# Altium PCB GeekIMU.PcbDoc
Units mil, origin at the board's own origin, x right, y up, seen from the top; angles counter-clockwise.
Board outline 1150.03 x 1090.03 mil, 2 copper layers (Top Layer, Bottom Layer); 39 components, 54 nets, 179 pads, 84 vias.
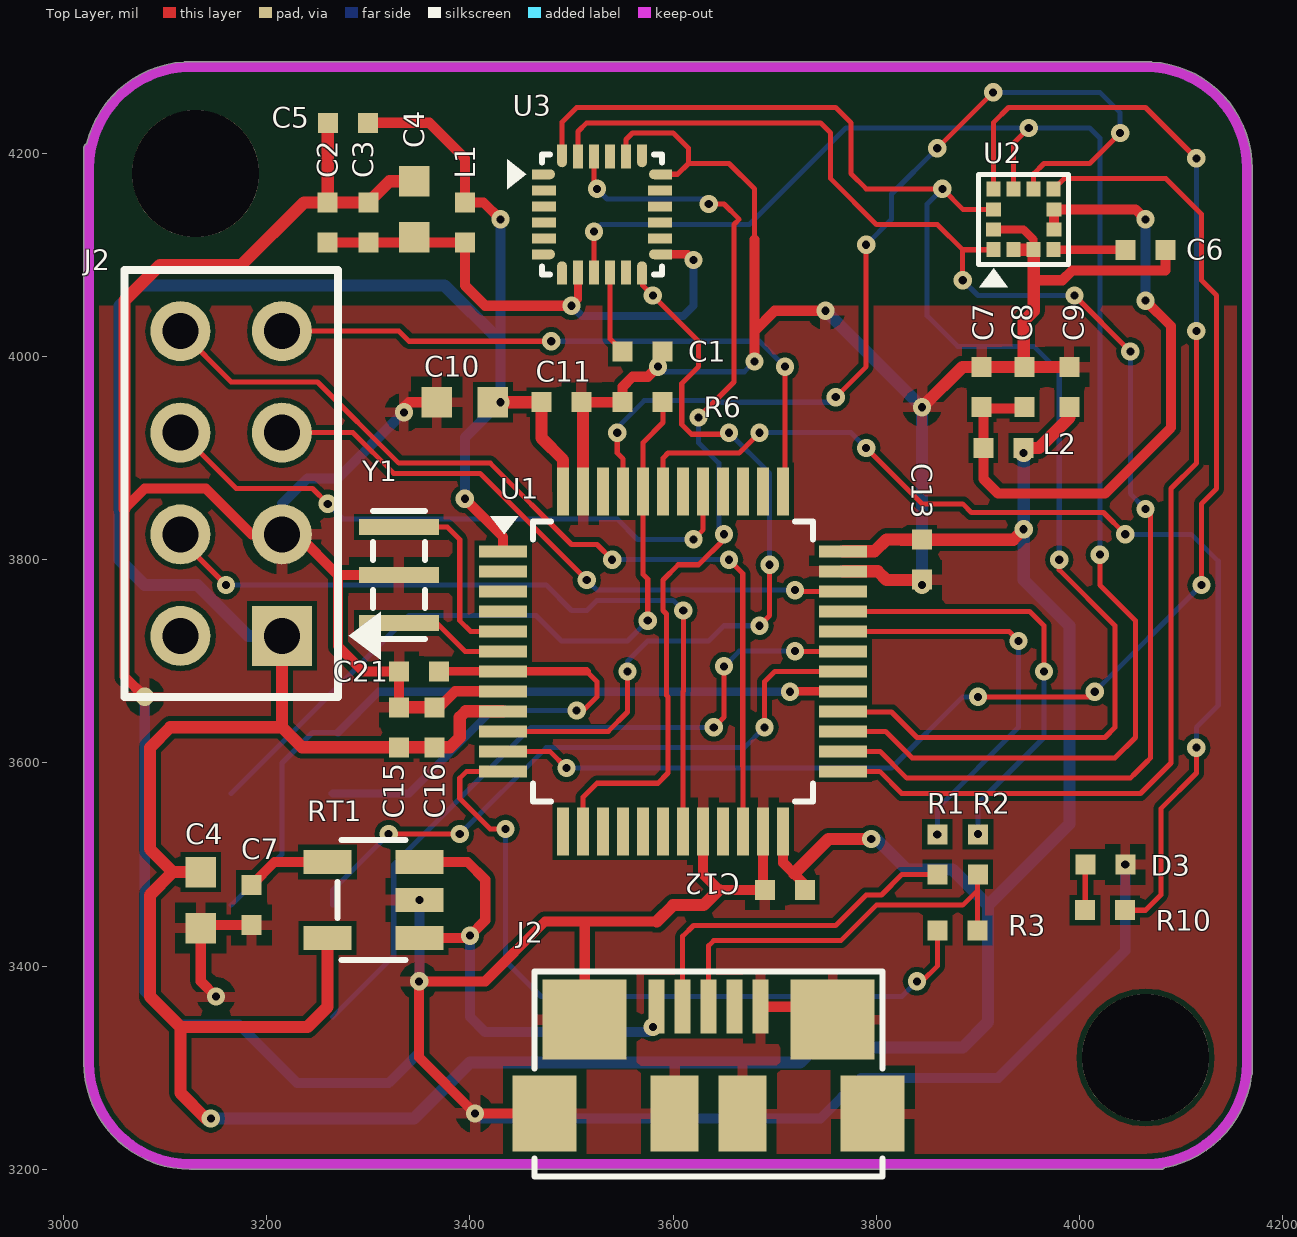
[diagram p0: Top Layer view]
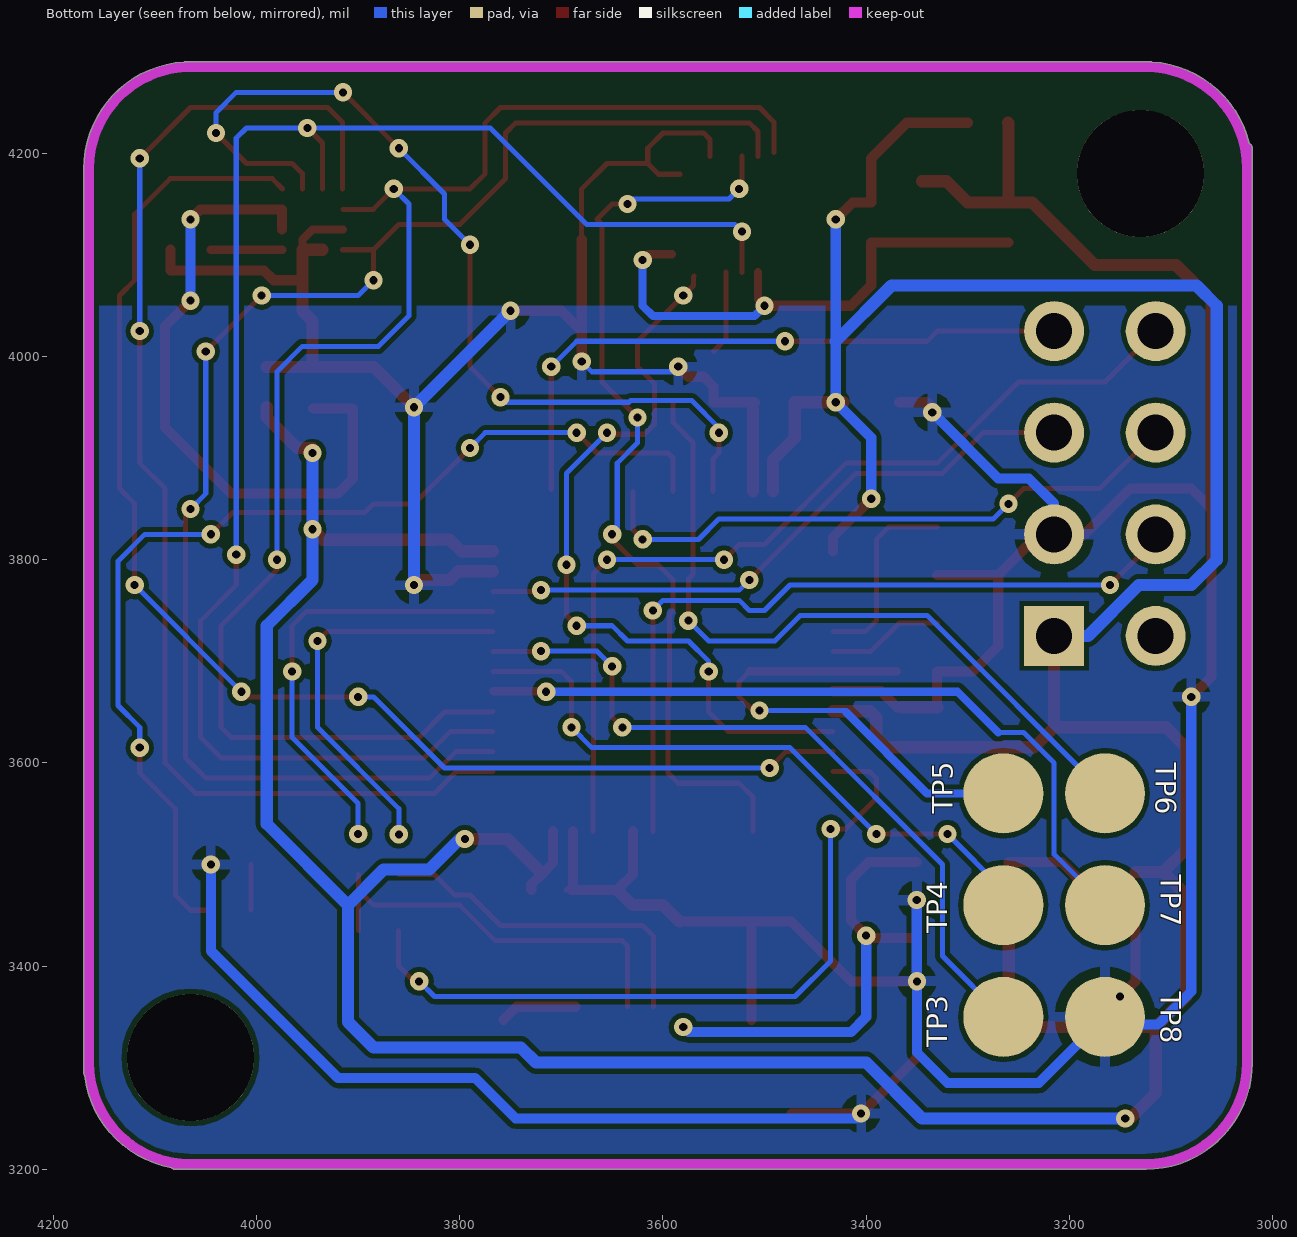
[diagram p1: Bottom Layer view, seen from below]
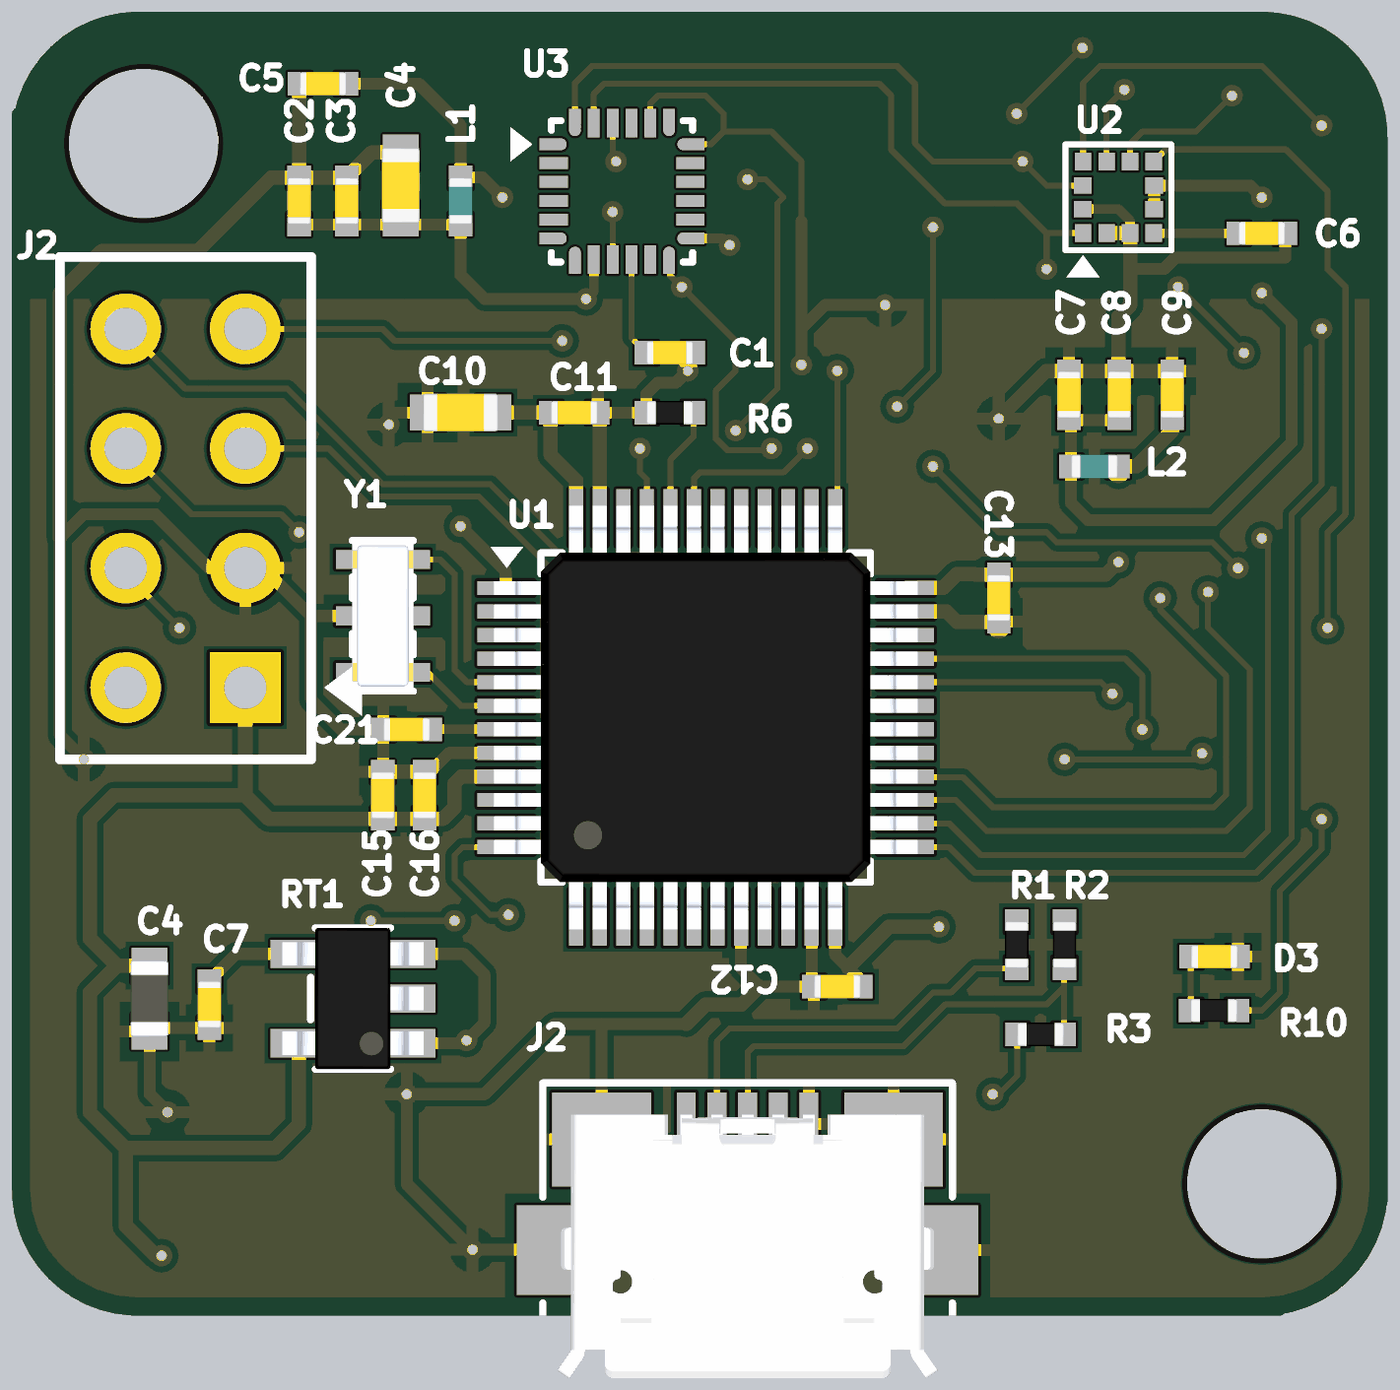
[diagram p2: 3D render of the assembled board from above, using the file's embedded part models]

## Layer stack, top to bottom
Top Solder: solder mask 0.4, Solder Resist, Dk 3.5
Top Layer: signal copper 1.4
Dielectric1: dielectric 12.6, FR-4, Dk 4.8
Bottom Layer: signal copper 1.4
Bottom Solder: solder mask 0.4, Solder Resist, Dk 3.5

## Board outline
3019.99,3305 3019.99,4205 cw(c3025,4205) 3022.9,4209.55 cw(c3125,4185) 3118.62,4289.82 cw(c3120,4285) 3120,4290.02 4070,4290.02 cw(c4070,4285) 4071.38,4289.82 cw(c4065,4185) 4170.02,4185 4170.02,3295 cw(c4165,3295) 4169.25,3292.34 cw(c4065,3305) 4083.75,3201.67 cw(c4080,3205) 4080,3199.99 3125,3199.99 cw(c3125,3305)

## Design rules (kind name [scope] priority, off if disabled: settings)
Clearance [All] p1: gap=5 ignorepadtopadclearanceinfootprint=FALSE except(0: Arc-Hole Track-Hole SMDPad-Hole THPad-Hole Via-Hole Fill-Hole Poly-Hole Region-Hole Text-Hole)
DiffPairsRouting [All] p1: maxlimit=20 minlimit=5 mostfreqgap=5 toplayer_minwidth=15 toplayer_maxwidth=15 toplayer_prefwidth=15 bottomlayer_minwidth=15 bottomlayer_maxwidth=15 bottomlayer_prefwidth=15 maxuncoupledlength=500
FabricationTestpoint [(IsPad And (OnTopLayer Or OnBottomLayer))] p1: side=3 testpointundercomponent=TRUE minsize=40 maxsize=100 preferedsize=60 minholesize=0 maxholesize=40 preferedholesize=32 testpointgrid=1 allowsidetop=TRUE allowsidebottom=TRUE usegrid=TRUE gridtolerance=0.01
HoleSize [All] p1: absolutevalues=TRUE maxlimit=135 minlimit=1 maxpercent=80.000 minpercent=20.000
MinimumSolderMaskSliver [All] p1: minsoldermaskwidth=1
PolygonConnect [All] p1: connectstyle=Relief reliefconductorwidth=10 reliefentries=4 polygonreliefangle="90 Angle" airgapwidth=10
RoutingVias [All] p1: holewidth=8 width=18 viastyle="Through Hole" minholewidth=8 minwidth=8 maxholewidth=50 maxwidth=50
SilkToSilkClearance [All] p1: silktosilkclearance=0
SilkToSolderMaskClearance SilkscreenOverComponentPads [IsPad] p1: minsilkscreentomaskgap=0 clearancetoexposedcopper=TRUE
SolderMaskExpansion [All] p1: expansion=4
Width [All] p1: maxlimit=30 minlimit=5 preferedwidth=10 minimp=50.000000 maximp=50.000000 favimp=50.000000
24 further rules are at their usual default settings.

## Classes and differential pairs
component class MCU: C10 C11 C12 C13 C15 C16 C21 D3 R6 R10 TP3 TP4 TP5 TP6 TP7 U1 Y1
component class Power: C4 C7 RT1
component class Sensor: C1 C2 C3 C4 C5 C6 C7 C8 C9 L1 L2 U2 U3
component class USB: J2 R1 R2 R3 TP8

## Components (designator, comment, footprint, x,y, rotation, side; value= is the part's Value field where it differs from the comment)
C1 "0.1uF" CAP_CERAMIC_0402 3570,4005 r0 top
C2 "0.01uF" CAP_CERAMIC_0402 3260,4131.97 r90 top
C3 "0.1uF" CAP_CERAMIC_0402 3300,4131.97 r90 top
C4 "Cap" RESISTOR_0603 3135,3465 r90 top
C4 "10uF" CAP_CERAMIC_0603 3345,4145 r90 top
C5 "0.1uF" CAP_CERAMIC_0402 3280,4230 r180 top
C6 "0.1uF" CAP_CERAMIC_0402 4065,4105 r0 top
C7 "Cap" CAP_CERAMIC_0402 3185,3460 r90 top
C7 "0.1uF" CAP_CERAMIC_0402 3903.7,3970 r90 top
C8 "1uF" CAP_CERAMIC_0402 3945.8,3970 r90 top
C9 "0.1uF" CAP_CERAMIC_0402 3990,3970 r90 top
C10 "10uF" CAP_CERAMIC_0603 3395,3955 r180 top
C11 "0.1uF" CAP_CERAMIC_0402 3490,3955 r0 top
C12 "0.1uF" CAP_CERAMIC_0402 3710,3475 r180 top
C13 "0.1uF" CAP_CERAMIC_0402 3845,3800 r270 top
C15 "1uF" CAP_CERAMIC_0402 3330,3635 r90 top
C16 "0.1uF" CAP_CERAMIC_0402 3365,3635 r90 top
C21 "0.1uF" CAP_CERAMIC_0402 3350,3690 r180 top
D3 "LED1" CAP_CERAMIC_0402 4025.31,3500 r0 top
J2 "ZX62-B-5PA(11)" ZX62-B-5PA(11) 3635,3360 r180 top
J2 "4-103240-0-04" 4-103240-0-04 3215,3725 r90 top
L1 "MMZ1005S601C" INDUCTOR_0402 3395,4131.97 r90 top
L2 "MMZ1005S601C" INDUCTOR_0402 3925,3910 r0 top
R1 "22 ohm" RESISTOR_0402 3860,3510 r90 top
R2 "22 ohm" RESISTOR_0402 3900,3510 r90 top
R3 "1.5K" RESISTOR_0402 3880,3435 r180 top
R6 "10K" RESISTOR_0402 3570,3955 r0 top
R10 "" RESISTOR_0402 4025,3455 r0 top
RT1 "RT9193" SOT23-5L 3305,3465 r180 top
TP3 "TEST POINT" TEST_POINT_PAD 3265,3350 r0 bottom
TP4 "TEST POINT" TEST_POINT_PAD 3265,3460 r0 bottom
TP5 "TEST POINT" TEST_POINT_PAD 3265,3570 r0 bottom
TP6 "TEST POINT" TEST_POINT_PAD 3165,3570 r90 bottom
TP7 "TEST POINT" TEST_POINT_PAD 3165,3460 r90 bottom
TP8 "TEST POINT" TEST_POINT_PAD 3165,3350 r180 bottom
U1 "STM32F103C8T6" LQFP48 3600,3700 r0 top
U2 "LIS3MDL" LGA-12 3945,4135 r90 top
U3 "MPU-6500" QFN-24 3530,4140 r0 top
Y1 "CSTCE8M00G55-R0" CSTCE 3330,3785 r90 top

## Footprints (in the part's own frame and the unit in brackets; to place one, negate y for a bottom-side part, rotate by r counter-clockwise, add the part's x,y. Pads: shape width x height; smd on the part's side, far side on the other; paste and mask are expansions set on the pad)
4-103240-0-04 [mm]
  rect 1.5x1.5 hole 0.9 mask+0.076: 1(0,0)
  round 1.5 hole 0.9 mask+0.076: 2(0,2.54) 3(2.54,0) 4(2.54,2.54) 5(5.08,0) 6(5.08,2.54) 7(7.62,0) 8(7.62,2.54)
  silkscreen extent -1.52,-2.48 9.15,3.94
CAP_CERAMIC_0402 [mm]
  rect 0.5x0.5 smd mask+0.051: 1(-0.5,0) 2(0.5,0)
  body extent -0.5,-0.25 0.5,0.25, height 0.56
CAP_CERAMIC_0603 [mil]
  rect 30x30 smd mask+2: 1(-27.56,0) 2(27.56,0)
  body extent -31,-16 31,16, height 22
CSTCE [mm]
  rect 0.4x2 smd mask+0.064: 1(-1.2,0) 2(0,0) 3(1.2,0)
  silkscreen extent -1.6,-0.65 1.6,0.65, body extent -1.6,-0.65 1.6,0.65, height 0.7
INDUCTOR_0402 [mm]
  rect 0.5x0.5 smd mask+0.051: 1(-0.5,0) 2(0.5,0)
  body extent -0.5,-0.25 0.5,0.25, height 0.6
LGA-12 [mm]
  rect 0.375x0.35 smd mask+0.051: 1(-0.76,0.75) 2(-0.76,0.25) 3(-0.76,-0.25) 4(-0.76,-0.75) 7(0.76,-0.75) 8(0.76,-0.25) 9(0.76,0.25) 10(0.76,0.75)
  rect 0.35x0.375 smd mask+0.051: 5(-0.25,-0.76) 6(0.25,-0.76) 11(0.25,0.76) 12(-0.25,0.76)
  silkscreen extent -1.7,-1.12 1.13,1.13, body extent -1,-1 1,1, height 1
LQFP48 [mm]
  rect 1.2x0.3 smd mask+0.064: 1(-4.25,2.75) 2(-4.25,2.25) 3(-4.25,1.75) 4(-4.25,1.25) 5(-4.25,0.75) 6(-4.25,0.25) 7(-4.25,-0.25) 8(-4.25,-0.75) 9(-4.25,-1.25) 10(-4.25,-1.75) 11(-4.25,-2.25) 12(-4.25,-2.75) 25(4.25,-2.75) 26(4.25,-2.25) 27(4.25,-1.75) 28(4.25,-1.25) 29(4.25,-0.75) 30(4.25,-0.25) 31(4.25,0.25) 32(4.25,0.75) 33(4.25,1.25) 34(4.25,1.75) 35(4.25,2.25) 36(4.25,2.75)
  rect 0.3x1.2 smd mask+0.064: 13(-2.75,-4.25) 14(-2.25,-4.25) 15(-1.75,-4.25) 16(-1.25,-4.25) 17(-0.75,-4.25) 18(-0.25,-4.25) 19(0.25,-4.25) 20(0.75,-4.25) 21(1.25,-4.25) 22(1.75,-4.25) 23(2.25,-4.25) 24(2.75,-4.25) 37(2.75,4.25) 38(2.25,4.25) 39(1.75,4.25) 40(1.25,4.25) 41(0.75,4.25) 42(0.25,4.25) 43(-0.25,4.25) 44(-0.75,4.25) 45(-1.25,4.25) 46(-1.75,4.25) 47(-2.25,4.25) 48(-2.75,4.25)
  silkscreen extent -4.58,-3.5 3.5,3.62, body extent -4.5,-4.5 4.5,4.5, height 1.5
QFN-24 [mm]
  rect 0.4x0.25 smd mask+0.05: 1(-1.55,1) 6(-1.55,-1) 13(1.55,-1) 18(1.55,1)
  rrect100% 0.35x0.25 smd mask+0.05: 1(-1.35,1) 6(-1.35,-1) 13(1.35,-1) 18(1.35,1)
  rect 0.6x0.25 smd mask+0.05: 2(-1.45,0.6) 3(-1.45,0.2) 4(-1.45,-0.2) 5(-1.45,-0.6) 14(1.45,-0.6) 15(1.45,-0.2) 16(1.45,0.2) 17(1.45,0.6)
  rect 0.25x0.4 smd mask+0.05: 7(-1,-1.55) 12(1,-1.55) 19(1,1.55) 24(-1,1.55)
  rrect100% 0.25x0.35 smd mask+0.05: 7(-1,-1.35) 12(1,-1.35) 19(1,1.35) 24(-1,1.35)
  rect 0.25x0.6 smd mask+0.05: 8(-0.6,-1.45) 9(-0.2,-1.45) 10(0.2,-1.45) 11(0.6,-1.45) 20(0.6,1.45) 21(0.2,1.45) 22(-0.2,1.45) 23(-0.6,1.45)
  silkscreen extent -2.37,-1.5 1.5,1.5, body extent -1.5,-1.5 1.5,1.5, height 0.9
RESISTOR_0402 [mm]
  rect 0.5x0.5 smd mask+0.051: 1(-0.5,0) 2(0.5,0)
  body extent -0.5,-0.25 0.5,0.25, height 0.38
RESISTOR_0603 [mil]
  rect 30x30 smd mask+2: 1(-27.56,0) 2(27.56,0)
  body extent -32,-16 31,16, height 20
SOT23-5L [mm]
  rect 1.2x0.6 smd mask+0.051: 1(-1.15,0.95) 2(-1.15,0) 3(-1.15,-0.95) 4(1.15,-0.95) 5(1.15,0.95)
  silkscreen extent -0.8,-1.5 0.9,1.5, body extent -1.5,-1.5 1.5,1.5, height 1.3
TEST_POINT_PAD [mm]
  round 2 smd mask+0.064: 1(0,0)
ZX62-B-5PA(11) [mm]
  rect 0.4x1.35 smd mask+0.064: 1(-1.3,0) 2(-0.65,0) 3(0,0) 4(0.65,0) 5(1.3,0)
  rect 2.1x2 smd mask+0.064: 6(-3.1,0.325) 7(3.1,0.325)
  rect 1.6x1.9 smd mask+0.064: 8(-4.1,2.675) 9(4.1,2.675)
  rect 1.2x1.9 smd mask+0.064: 8(-0.85,2.675) 9(0.85,2.675)
  silkscreen extent -4.35,-0.87 4.35,4.25, body extent -4.04,-0.2 4.04,5.4, height 2.79

## Part data
C1 C3 C5 C6 C7 C9 C11 C12 C13 C16 C21: library part "CAP, CERAMIC", "CAP, CERAMIC, 0.1uF, ?0%, 16V, X7R, 0402"
C2: library part "CAP, CERAMIC", "CAP, CERAMIC, 0.01uF, ?0%, 25V, X7R, 0402"
C4 C7: "Capacitor"
C4 C10: library part "CAP, CERAMIC", "CAP, CERAMIC, 10uF, ?0%, 6.3V, X5R, 0603"
C8 C15: library part "CAP, CERAMIC", "CAP, CERAMIC, 1uF, ?0%, 10V, X5R, 0402"
D3: "Typical RED GaAs LED"
J2: "CONNECTOR, USB MICRO B, R/A, SMD"
J2: "CONNECTOR, HEADER, 2X4, 0.1\" PITCH"
L1 L2: library part INDUCTOR, "FERRITE CHIP BEAD, 600 OHM @ 100MHz, 300mA, 0402"
R1 R2: library part RESISTOR, "RES, 22 OHM, 1/10W, ?%, 0402"
R3: library part RESISTOR, "RES, 1.5K OHM, 1/10W, ?%, 0402"
R6: library part RESISTOR, "RES, 10K OHM, 1/10W, ?%, 0402"
R10: library part Res2, "Resistor"
RT1: "Power"
TP3 TP4 TP5 TP6 TP7 TP8: library part TEST_POINT
U1: "IC, STM32 MICROCONTROLLER, ARM CORTEX M3"
U2: "IC, MEMS 3 AXIS MAGNETOMETER"
U3: "IC, MEMS 3 AXIS GYROSCOPE AND 3 AXIS ACCELEROMETER"
Y1: "CERAMIC RESONATOR, 8MHz, +/-0.2%, 33pF, SMD"

## Free pads (board coordinates)
  round 125 hole 125 unplated: 0(3130,4180) 0(4065,3310)

## Via types
v1: diameter 18, hole 8, Top Layer to Bottom Layer, tented both sides, 84 vias

## Nets (pads, with @x,y where several pads share a name; then routed paths per layer and width w, separated by ;. In a path a pad name is that pad's centre, name@x,y a point inside that pad or via, vN(x,y) a via of type N, cw(c..) or ccw(c..) an arc to the next point about the centre after c; other vN are vias at no path point)
3.3V: C4.2@3135,3492.56 C5.1 C9.1 C10.1 C11.1 C12.1 C13.1 C15.1 C16.1 J2.1@3215,3725 L1.2 L2.2 RT1.5 U1.1 U1.9 U1.24 U1.36 U1.48 | length 4652.9
  Top Layer w10: C5.1 3360,4230 3395,4195 L1.2 3413.35,4151.65 v1(3430,4135) ; v1(3395,3860) 3432.68,3822.32 U1.1 ; U1.24 3708.27,3501.73 3718.98,3491.02 3729.68,3480.32 C12.1
  Top Layer w12: C4.2@3135,3492.56 3107.56,3492.56 ; v1(3145,3250) 3140,3250 3115,3275 3115,3340 ; J2.1@3215,3725 3215,3635 ; RT1.5 3259.72,3359.72 3240,3340 3115,3340 ; C10.1 v1(3430,3955) C11.1 3470.32,3919.68 3491.73,3898.27 U1.48 ; U1.9 3395.79,3650.79 3390,3645 3390,3625 3380.32,3615.32 C16.1 C15.1 3234.68,3615.32 3215,3635 ; 3718.98,3491.02 3752.95,3525 v1(3795,3525) ; U1.36 3798.27,3808.27 3810,3820 3824.68,3820 3825,3819.68 C13.1 3934.68,3819.68 v1(3945,3830) ; L2.2@3945,3910 3960,3910 3990,3940 C9.1 ; 3107.56,3492.56 3085,3470 3085,3370 3115,3340 ; 3107.56,3492.56 3085,3515.12 3085,3615 3105,3635 3215,3635
  Bottom Layer w10: v1(3395,3860) 3395,3920 v1(3430,3955) 3430,4015 v1(3430,4135)
  Bottom Layer w12: v1(3145,3250) 3345,3250 3400,3305 3725,3305 3740,3320 3885,3320 3910,3345 3910,3460 ; J2.1@3215,3725 3181.72,3725 3131.72,3775 3080,3775 3055,3800 3055,4050 3075,4070 3375,4070 3430,4015 ; v1(3795,3525) 3800,3525 3830,3495 3875,3495 3910,3460 ; v1(3945,3905) v1(3945,3830) 3945,3780 3990,3735 3990,3540 3910,3460
AUX_CL: U3.7
AUX_DA: U3.21
BOOT0: R6.2 TP6.1 U1.44 | length 726.2
  Top Layer w5: v1(3575,3740) 3575,3780.94 3570.47,3785.47 U1.44 3570.47,3915.47 3590,3935 3590,3954.69 R6.2
  Bottom Layer w5: TP6.1 3340,3745 3465,3745 3490,3720 3555,3720 v1(3575,3740)
D+: J2.4@3609.41,3360 R1.1 | length 345.2
  Top Layer w5: J2.4@3609.41,3360 3609.41,3429.41 3620,3440 3760,3440 3790,3470 3805,3470 3825.32,3490.32 R1.1
D-: J2.3@3635,3360 R2.1 R3.1 | length 402.8
  Top Layer w5: J2.3@3635,3360 3635,3420 3640,3425 3765,3425 3800,3460 3885,3460 3899.68,3474.68 ; R3.1 3899.68,3474.68 ; R2.1 3899.68,3490 3899.68,3474.68
FSYNC: U3.11
GND: C1.2 C2.2 C3.2 C4.1@3135,3437.44 C4.2@3345,4172.56 C5.2 C6.2 C7.1@3185,3440.32 C7.2@3903.7,3989.68 C8.2 C9.2 C10.2 C11.2 C12.2 C13.2 C15.2 C16.2 C21.2 D3.2 J2.1@3686.18,3360 J2.3@3215,3825 J2.6@3757.05,3347.2 J2.7@3512.95,3347.2 J2.8@3668.46,3254.69 J2.8@3796.42,3254.69 J2.9 R6.1 RT1.2 TP8.1 U1.8 U1.20 U1.23 U1.35 U1.47 U2.2 U2.3 U2.12 U3.18 U3.20 Y1.2 | length 5839.9
  Top Layer w5: U3.20 3553.62,4213.62 3560,4220 3600,4220 3615,4205 3615,4190 ; U3.18@3583.15,4179.37 3591.02,4179.37 3604.37,4179.37 3615,4190 ; 3680,4115 3680,4165 3655,4190 3615,4190 ; C12.2@3688.58,3481.73 C12.2@3695.31,3475
  Top Layer w8: U2.12 3944.84,4125.16 3954.84,4115.16 U2.3
  Top Layer w10: v1(3080,3665) 3060,3685 3060,3850 3080,3870 3140,3870 3185,3825 J2.3@3215,3825 ; v1(3150,3370) 3135,3385 3135,3437.44 3137.88,3440.32 C7.1@3185,3440.32 ; J2.3@3230,3825 3270,3785 ; C15.2 3330.32,3655 C21.2 3295,3690 3270,3715 3270,3785 ; Y1.2 3270,3785 ; v1(3335,3945) 3335,3950 3340,3955 C10.2 ; C16.2 3369.69,3654.69 3385.47,3670.47 U1.8 ; J2.9@3473.27,3255 v1(3405,3255) 3350,3310 v1(3350,3385) 3415,3385 3473.82,3443.82 3515,3443.82 ; C11.2 R6.1 3550.32,3970.32 3560,3980 3575,3980 v1(3585,3990) ; J2.7@3512.95,3347.2 3512.95,3441.77 3515,3443.82 ; 3583.82,3443.82 3515,3443.82 ; U1.20 3629.53,3490.47 3645,3475 C12.2 ; v1(3680,3995) 3680,4025 ; 3680,4115 3680,4025 ; J2.1@3686.18,3360 3744.25,3360 J2.6@3757.05,3347.2 ; C12.2@3688.58,3481.73 U1.23 ; v1(3750,4045) 3700,4045 3680,4025 ; 3954.84,4075 3983.13,4075 3992.81,4084.68 4084.68,4084.68 C6.2
  Top Layer w12: 3060,3850 3060,4055 3095,4090 3175,4090 3236.65,4151.65 C2.2 ; C5.2 3260,4229.69 C2.2 ; C15.2 C16.2 ; C4.2@3345,4172.56 3320.91,4172.56 C3.2 C2.2 ; U1.47 C11.2@3511.42,3948.27 ; 3583.82,3443.82 3600,3460 3630,3460 3645,3475 ; U1.35 3801.42,3788.58 3810,3780 C13.2@3844.69,3780 ; v1(3845,3950) 3884.68,3989.68 3903.7,3989.68 C8.2 ; U2.2 U2.3 3954.84,4075 3954.84,4044.84 3945,4035 3945,3990.48 C8.2 ; C9.2 C8.2
  Bottom Layer w5: v1(3585,3990) 3590,3985 3670,3985 v1(3680,3995)
  Bottom Layer w10: v1(3080,3665) 3080,3375 3112.5,3342.5 3172.5,3342.5 3230,3285 3320,3285 3350,3315 v1(3350,3385) 3350.28,3385.28 v1(3350.28,3465) ; J2.3@3215,3825 3215,3855 3240,3880 3270,3880 v1(3335,3945) ; v1(3405,3255) 3410,3250 3745,3250 3785,3290 3920,3290 4045,3415 v1(4045,3500)
  Bottom Layer w12: v1(3750,4045) v1(3845,3950) v1(3845,3775)
GYRO_CS: U1.14 U3.22 | length 923.4
  Top Layer w5: U1.14 3511.42,3566.42 3525,3580 3585,3580 3595,3590 3595,3665 3593.5,3666.5 3593.5,3746.5 3590,3750 3590,3780 3605,3795 3625,3795 3650,3820 v1(3650,3825) ; U3.22 3522.13,4167.87 v1(3525,4165) ; v1(3625,3940) 3660,3975 3660,4130 3665,4135 3650,4150 v1(3635,4150)
  Bottom Layer w5: v1(3525,4165) 3535,4155 3630,4155 v1(3635,4150) ; v1(3625,3940) 3625,3915 3645,3895 3645,3830 v1(3650,3825)
GYRO_IRQ: U1.10 U3.12 | length 762.2
  Top Layer w5: U1.10 3536.1,3631.1 3555,3650 v1(3555,3690) ; U3.12@3569.37,4078.98 3570,4078.35 3570,4070 v1(3580,4060) 3625,4015 3625,3990 3608.5,3973.5 3608.5,3933.17 3618.17,3923.5 3653.5,3923.5 v1(3655,3925) ; v1(3685,3735) 3695,3745 v1(3695,3795)
  Bottom Layer w5: v1(3555,3690) 3555,3700 3575,3720 3635,3720 3650,3735 v1(3685,3735) ; v1(3655,3925) 3695,3885 v1(3695,3795)
ICLK: U1.21
IDATA: J2.8@3115,4025 U1.22 | length 906.3
  Top Layer w5: J2.8@3115,4025 3165,3975 3250,3975 3330,3895 3420,3895 3500,3815 3525,3815 v1(3540,3800) ; v1(3655,3800) 3668.5,3786.5 3668.5,3596.5 3668.9,3596.1 U1.22
  Bottom Layer w5: v1(3540,3800) v1(3655,3800)
IO0: U1.18
IO1: J2.4@3115,3825 U1.19 | length 754.7
  Top Layer w5: J2.4@3115,3825 3115,3820 v1(3160,3775) ; U1.19 3609.84,3670.16 3610,3670.32 v1(3610,3750)
  Bottom Layer w5: v1(3160,3775) 3475,3775 3500,3750 3515,3750 3525,3760 3600,3760 v1(3610,3750)
IO3: U1.40
IO4: J2.6@3115,3925 U1.41 | length 599.8
  Top Layer w5: J2.6@3115,3925 3170,3870 3245,3870 v1(3260,3855) ; v1(3620,3820) 3629.53,3829.53 U1.41
  Bottom Layer w5: v1(3260,3855) 3275,3840 3545,3840 3565,3820 v1(3620,3820)
LIS3MDL_VDDIO: C7.1@3903.7,3950.31 C8.1 L2.1 U2.5 U2.6 | length 654.8
  Top Layer w10: C8.1@3944.18,3948.7 3905.32,3948.7 L2.1 3905.32,3879.68 3920,3865 4025,3865 4090,3930 4090,4030 v1(4065,4055) ; U2.5 U2.6 4055.16,4144.84 v1(4065,4135)
  Bottom Layer w10: v1(4065,4055) v1(4065,4135)
MAG_CS: U1.25 U2.10 | length 1241.3
  Top Layer w5: U1.25 3803.27,3591.73 3825,3570 4060,3570 4090,3600 4090,3870 4115,3895 v1(4115,4025) ; U2.10 3915.47,4230.47 3930,4245 4065,4245 v1(4115,4195)
  Bottom Layer w5: v1(4115,4025) v1(4115,4195)
MAG_DRDY: U1.45 U2.8 | length 927.9
  Top Layer w5: v1(3545,3925) 3545,3905 3550.79,3899.21 U1.45 ; v1(3760,3960) 3790,3990 v1(3790,4110) ; v1(3860,4205) v1(3915,4260) ; U2.8 3954.84,4179.84 3965,4190 4010,4190 v1(4040,4220)
  Bottom Layer w5: v1(3545,3925) 3545,3930 3571.5,3956.5 3631.83,3956.5 3633.33,3955 3755,3955 v1(3760,3960) ; v1(3790,4110) 3815,4135 3815,4160 v1(3860,4205) ; v1(3915,4260) 4020,4260 4040,4240 v1(4040,4220)
MAG_IRQ: U1.11 U2.7 | length 1310.3
  Top Layer w5: U1.11 3478.58,3611.42 v1(3495,3595) ; v1(3900,3665) 4010,3665 v1(4015,3670) ; U2.7 3984.61,4175 4085,4175 4120,4140 4120,4075 4135,4060 4135,3870 4120,3855 v1(4120,3775)
  Bottom Layer w5: v1(3495,3595) 3815,3595 3885,3665 v1(3900,3665) ; v1(4015,3670) v1(4120,3775)
MAG_SOC: U1.46
MEMS_MISO: U1.27 U2.9 U3.9 | length 1561.8
  Top Layer w5: U3.9 v1(3522.13,4122.87) ; U1.27 3808.9,3631.1 3835,3605 4035,3605 4055,3625 4055,3740 4020,3775 v1(4020,3805) ; U2.9 3935.16,4210.16 v1(3950,4225)
  Bottom Layer w5: v1(3522.13,4122.87) 3529.25,4130 3675,4130 3770,4225 v1(3950,4225) 4010,4225 4020,4215 v1(4020,3805)
MEMS_MOSI: U1.28 U2.11 U3.24 | length 1470.1
  Top Layer w5: U3.24@3490.63,4201.02 3490.63,4230.63 3505,4245 3760,4245 3775,4230 3775,4180 3790,4165 v1(3865,4165) 3885.16,4144.84 U2.11 ; U1.28 3768.11,3650 3815,3650 3840,3625 4025,3625 4035,3635 4035,3735 3980,3790 v1(3980,3800)
  Bottom Layer w5: v1(3865,4165) 3850,4150 3850,4040 3880,4010 3955,4010 3980,3985 v1(3980,3800)
MEMS_SCK: U1.26 U2.1 U3.23 | length 1469.4
  Top Layer w5: U3.23 3506.38,4221.38 3515,4230 3745,4230 3755,4220 3755,4175 3800,4130 3860,4130 3884.92,4105.08 ; U1.26 3803.58,3611.42 3830,3585 4050,3585 4055,3590 4065,3600 4070,3605 4070,3845 v1(4065,3850) ; v1(3885,4075) 3885,4105 3884.92,4105.08 ; U2.1 3884.92,4105.08 ; v1(3995,4060) v1(4050,4005)
  Bottom Layer w5: v1(3885,4075) 3900,4060 v1(3995,4060) ; v1(4050,4005) 4050,3865 v1(4065,3850)
MPU6500_VDDIO: C2.1 C3.1 C4.1@3345,4117.44 L1.1 U3.8 U3.13 | length 530.7
  Top Layer w8: v1(3500,4050) 3506.38,4056.38 U3.8 ; U3.13@3591.02,4100.63 3614.37,4100.63 v1(3620,4095)
  Top Layer w10: C2.1 C3.1 L1.1 3395,4070 3415,4050 v1(3500,4050)
  Bottom Layer w8: v1(3500,4050) 3510,4040 3610,4040 3620,4050 v1(3620,4095)
NC1: U3.1
NC2: U3.2
NC3: U3.3
NC4: U3.4
NC5: U3.5
NC6: U3.6
NC7: U3.14
NC8: U3.15
NC9: U3.16
NC10: U3.17
NetC1_1: C1.1 U3.10 | length 83.1
  Top Layer w5: U3.10 3537.87,4017.44 C1.1
NetC6_1: C6.1 U2.4 | length 70.8
  Top Layer w8: U2.4 4045.24,4105.08 C6.1
NetC7_2: C7.2@3185,3479.69 RT1.4 | length 84.1
  Top Layer w10: C7.2@3185,3479.69 3207.72,3502.4 RT1.4
NetD3_1: D3.1 R10.1 | length 44.7
  Top Layer w5: R10.1@4005.63,3455.32 D3.1
NRST: C21.1 TP5.1 U1.7 | length 473.9
  Top Layer w5: v1(3505,3651.5) 3511.5,3651.5 3525,3665 3525,3680 3515,3690
  Top Layer w8: C21.1 3369.84,3690.16 U1.7 3514.84,3690.16 3515,3690
  Bottom Layer w5: 3420,3650 3421.5,3651.5 v1(3505,3651.5)
  Bottom Layer w8: TP5.1 3340,3570 3420,3650
OSC_IN: U1.5 Y1.3 | length 192.1
  Top Layer w5: Y1.3 3377.76,3832.24 3390,3820 3390,3740 3400.47,3729.53 U1.5
OSC_OUT: U1.6 Y1.1 | length 114.2
  Top Layer w5: Y1.1 3367.24,3737.76 3395.16,3709.84 U1.6
RESV: U3.19
RUN_STATE: R10.2 U1.43 | length 1035.3
  Top Layer w5: U1.43 3590.16,3900.16 3595,3905 3665,3905 v1(3685,3925) ; v1(3790,3910) 3845,3855 3885,3855 3893.5,3846.5 4023.5,3846.5 v1(4045,3825) ; R10.2 4065,3455 4080,3470 4080,3555 4115,3590 v1(4115,3615)
  Bottom Layer w5: v1(3685,3925) 3775,3925 v1(3790,3910) ; v1(4045,3825) 4110,3825 4136.5,3798.5 4136.5,3656.5 4115,3635 v1(4115,3615)
RX: TP3.1 U1.31 | length 733.5
  Top Layer w5: v1(3640,3635) 3650,3645 v1(3650,3695) ; v1(3720,3710) 3720.16,3709.84 U1.31
  Bottom Layer w5: TP3.1 3325,3410 3325,3500 3460,3635 v1(3640,3635) ; v1(3650,3695) 3665,3710 v1(3720,3710)
SWCLK: J2.7@3215,4025 U1.37 | length 630.4
  Top Layer w5: J2.7@3215,4025 3330,4025 3340,4015 v1(3480,4015) ; U1.37@3710,3869.05 v1(3710,3990)
  Bottom Layer w5: v1(3480,4015) 3685,4015 v1(3710,3990)
SWDIO: J2.5@3215,3925 U1.34 | length 617
  Top Layer w5: J2.5@3215,3925 3285,3925 3325,3885 3410,3885 v1(3515,3780) ; v1(3720,3770) 3721.1,3768.9 U1.34
  Bottom Layer w5: v1(3515,3780) 3525,3770 v1(3720,3770)
SWO: U1.39
TX: TP4.1 U1.30 | length 632.8
  Top Layer w5: v1(3320,3530) v1(3390,3530) ; v1(3690,3635) 3690,3680 3700.16,3690.16 U1.30
  Bottom Layer w5: TP4.1 3265,3475 v1(3320,3530) ; v1(3390,3530) 3475,3615 3670,3615 v1(3690,3635)
UARTEN: TP7.1 U1.29 | length 742.2
  Top Layer w8: v1(3715,3670) 3715.47,3670.47 U1.29
  Bottom Layer w5: TP7.1 3215,3510 3215,3600 3245,3630 3270,3630
  Bottom Layer w8: 3270,3630 3310,3670 v1(3715,3670)
USBDM: R1.2 U1.32 | length 400.1
  Top Layer w5: U1.32 3930.47,3729.53 v1(3940,3720)
  Bottom Layer w5: v1(3860,3529.68) 3860,3555 3940,3635 v1(3940,3720)
USBDP: R2.2 U1.33 | length 435.8
  Top Layer w5: U1.33 3950.79,3749.21 3965,3735 v1(3965,3690) ; R2.2 v1(3900,3530)
  Bottom Layer w5: v1(3900,3530) 3900,3560 3965,3625 v1(3965,3690)
USBDP_PU: R3.2 U1.12 | length 739.9
  Top Layer w5: U1.12 3396.73,3591.73 3390,3585 3390,3565 3420,3535 v1(3435,3535) ; v1(3840,3385) 3845,3385 3860.32,3400.32 R3.2
  Bottom Layer w5: v1(3435,3535) 3435,3405 3470,3370 3825,3370 v1(3840,3385)
VCC: J2.5@3583.82,3360 RT1.1 RT1.3 | length 452.1
  Top Layer w10: RT1.1 3397.6,3427.6 v1(3400,3430) 3415,3445 3415,3485 3397.6,3502.4 RT1.3
  Bottom Layer w10: v1(3400,3430) 3400,3350 3415,3335 3575,3335 v1(3580,3340)
pads on no net: J2.2 U1.2 U1.3 U1.4 U1.13 U1.15 U1.16 U1.17 U1.38 U1.42

## Polygon pours and split planes (outlines as drawn)
GND on Bottom Layer "Top Layer-No Net" (solid, pour order 1001): 3025,4060 3035,4050 4165,4050 4165,3275 4160,3270 4150,3260 4150,3245 4145,3245 4130,3230 4115,3215 4110,3215 4105,3215 4100,3210 4095,3205 4080,3205 3110,3205 3105,3210 3100,3215 3080,3215 3070,3215 3055,3230 3040,3245 3040,3255 3040,3265 3030,3275
GND on Top Layer "Top Layer-GND" (solid, pour order 1005): 3030,4050 4160,4050 4165,4045 4165,3275 4150,3260 4150,3250 4120,3220 4110,3220 4095,3205 3115,3205 3110,3210 3085,3210 3055,3240 3045,3240 3045,3255 3025,3275 3025,3300

## Keep-outs
Keep-Out Layer:
  lines w10: 3025,4185 cw(c3125,4185) 3125,4285 ; 3025,4205 3025,3305 ccw(c3125,3305) 3125,3205 4080,3205 ; 3120,4285 4070,4285 ; 4065,3205 ccw(c4065,3305) 4165,3305 ; 4065,4285 cw(c4065,4185) 4165,4185 4165,3295